# Altium PCB NODEMCU_ESP12.PcbDoc
Units mil, origin at the board's own origin, x right, y up, seen from the top; angles counter-clockwise.
Board outline 1208.03 x 1850.28 mil, 2 copper layers (Top Layer, Bottom Layer); 38 components, 35 nets, 148 pads, 266 vias.
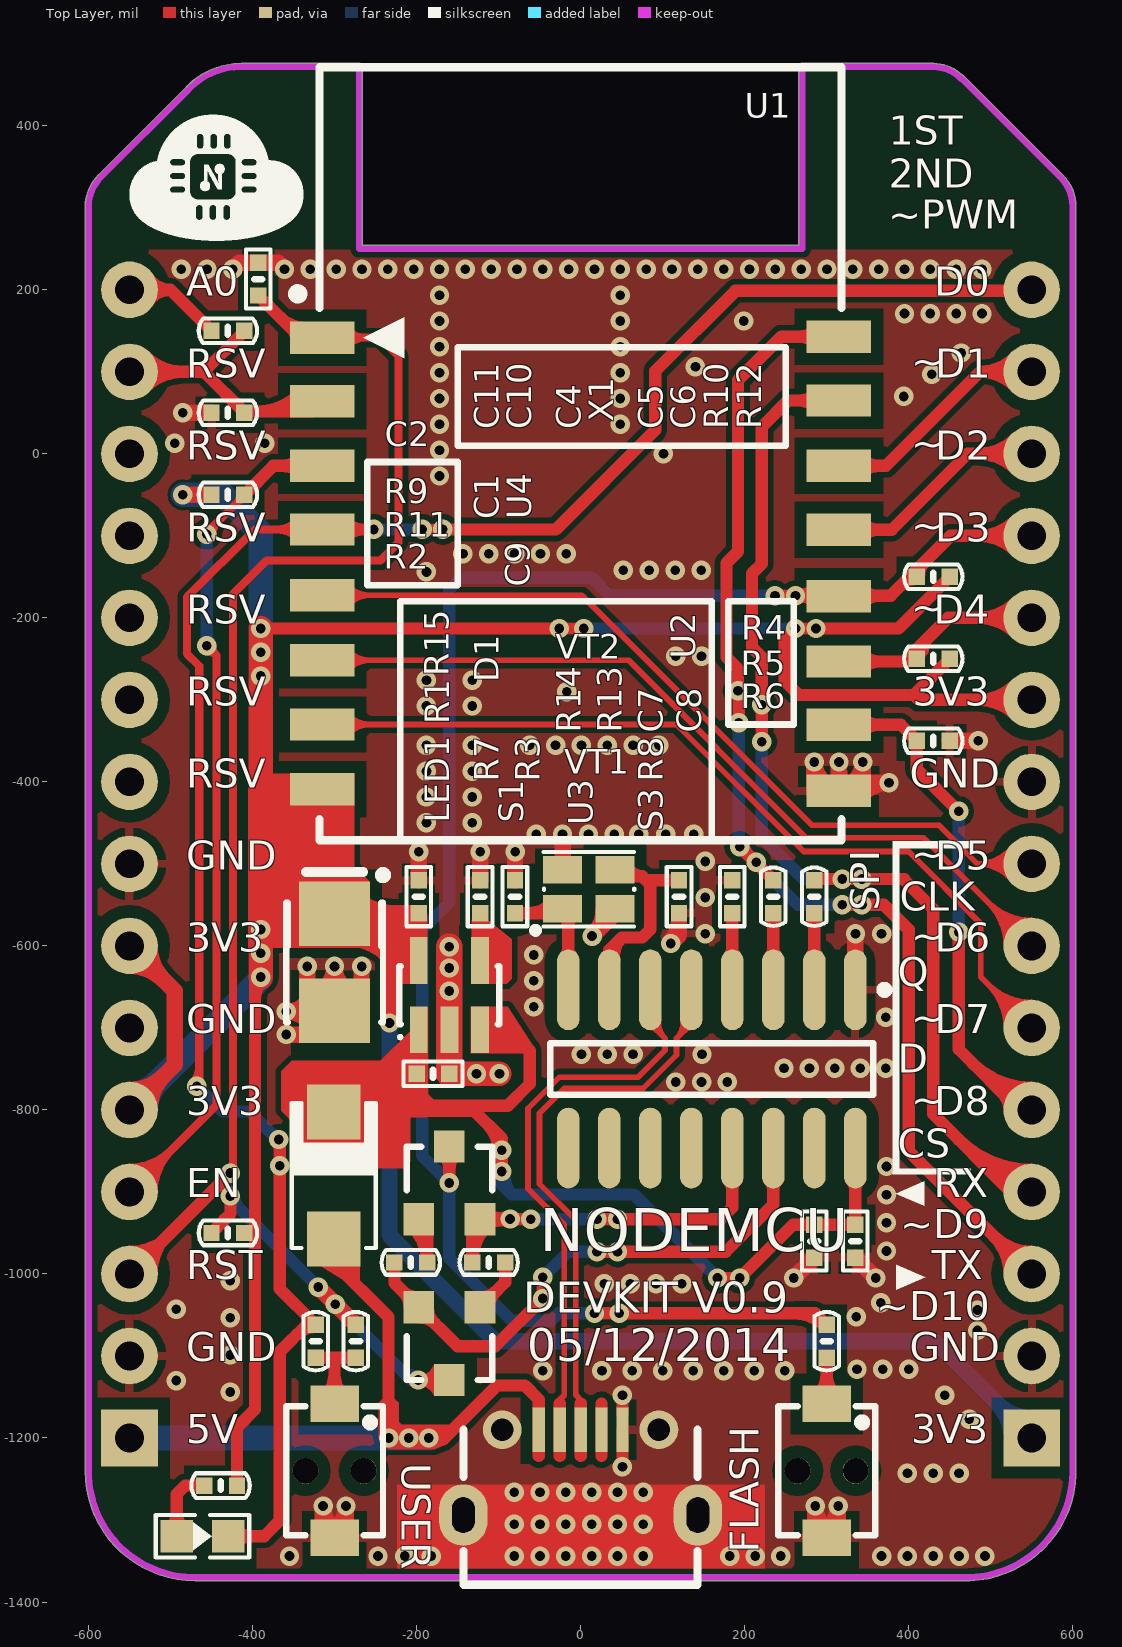
[diagram p0: Top Layer view]
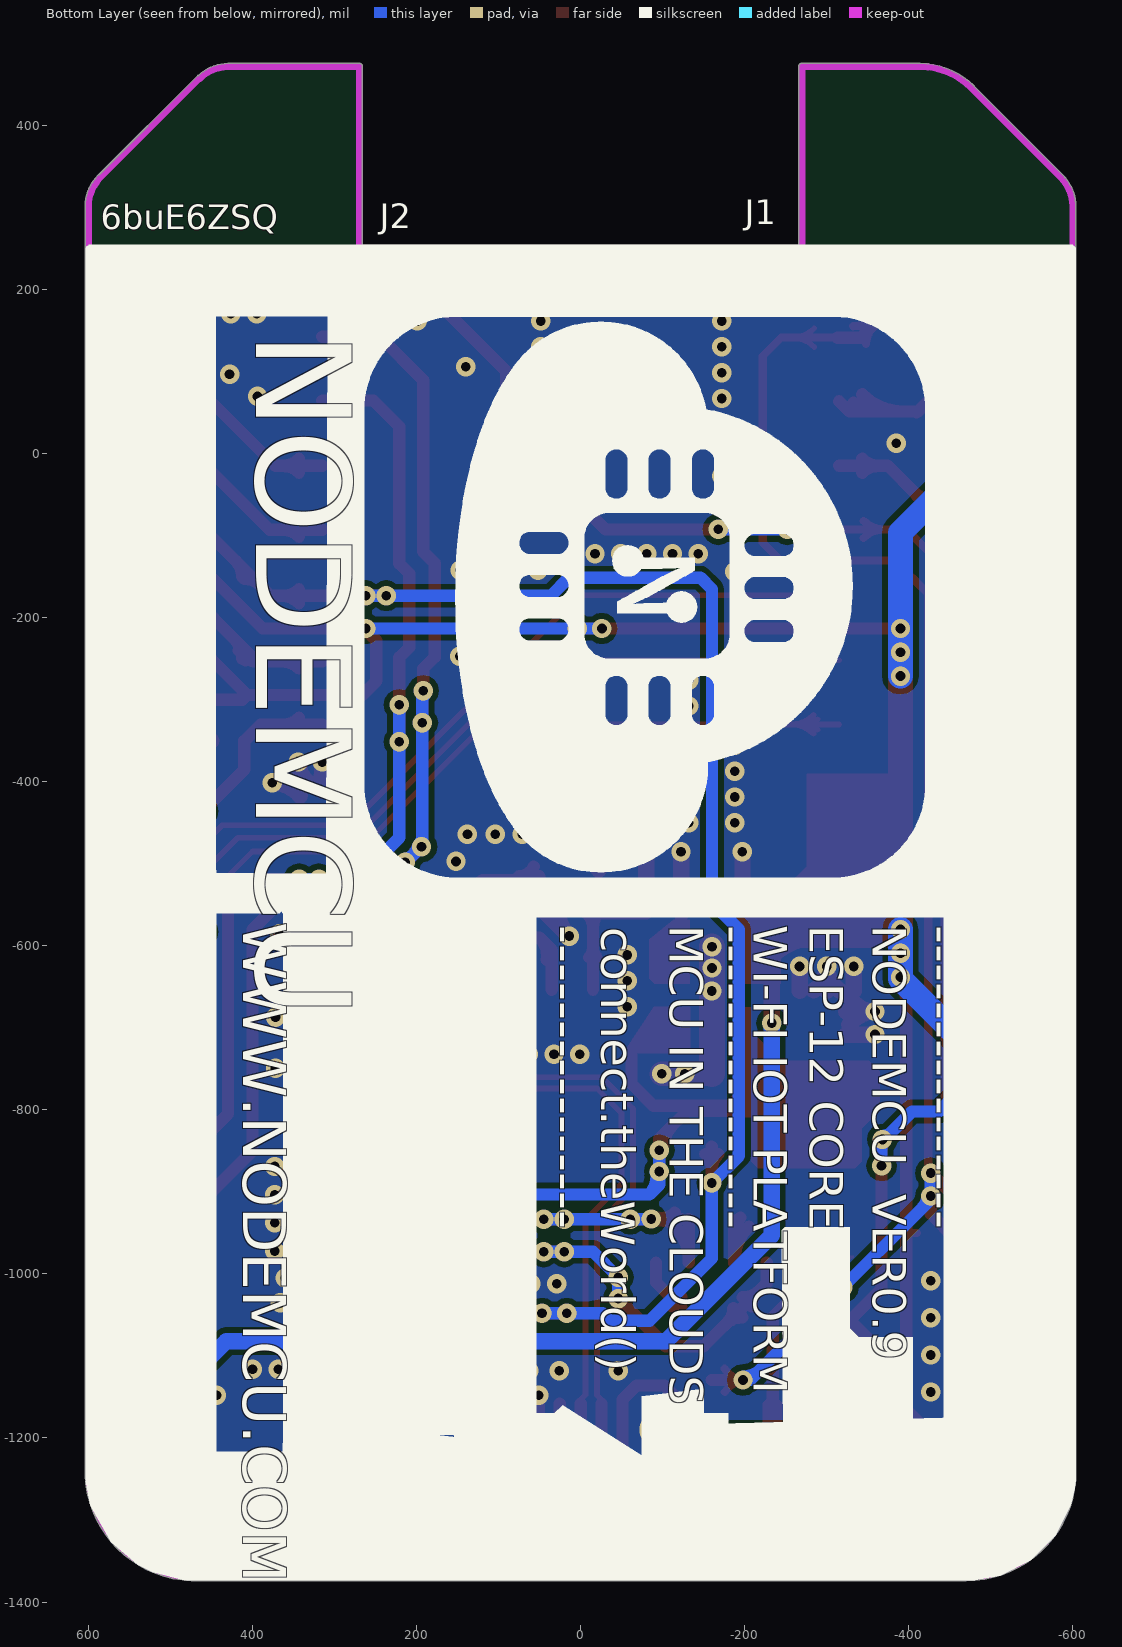
[diagram p1: Bottom Layer view, seen from below]

## Layer stack, top to bottom
Top Solder: solder mask 0.4, Solder Resist, Dk 3.5
Top Layer: signal copper 1.4
Dielectric 1: dielectric 12.6, FR-4, Dk 4.8
Bottom Layer: signal copper 1.4
Bottom Solder: solder mask 0.4, Solder Resist, Dk 3.5

## Board outline
-604.01,300 cw(c-600,300) -603.87,301.08 cw(c-599.89,301.64) -603.91,301.64 cw(c-549.89,301.64) -588.09,339.84 cw(c-585.25,337) -587.96,339.96 cw(c-585,337.25) -587.84,340.09 -481.09,446.84 cw(c-478.25,444) -480.35,447.42 cw(c-476.64,445.89) -479.48,448.73 cw(c-413,382.25) -413.95,476.26 cw(c-413.75,472.25) -413.75,476.26 -270,476.26 cw(c-270,472.25) -265.98,472.25 -265.98,254.02 265.99,254.02 265.99,472.25 cw(c270,472.25) 270,476.26 428.75,476.26 cw(c428.75,472.25) 430.18,476 cw(c429,422) 465.5,461.81 cw(c464.25,458) 467.09,460.84 587.59,340.33 cw(c585.36,337) 588.19,339.84 cw(c550,301.64) 604.01,302.13 cw(c550,301.64) 604.02,301.64 604.02,302 ccw(c600,302) 604.01,302.13 604.02,302 604.02,-1244 cw(c600,-1244) 603.94,-1244.76 cw(c470.37,-1240.37) 474.76,-1373.94 cw(c474,-1370) 474,-1374.01 -470.37,-1374.01 cw(c-470.37,-1240.37) -604.01,-1240.37

## Design rules (kind name [scope] priority, off if disabled: settings)
Clearance Clearance_Polygon [InNamedPolygon('Bottom Layer-GND') Or InNamedPolygon('Top Layer-GND') vs IsPad] p1: gap=15
Clearance [All] p2: gap=7
DiffPairsRouting [All] p1: maxlimit=10 minlimit=7 mostfreqgap=7 toplayer_minwidth=7 toplayer_maxwidth=100 toplayer_prefwidth=7 bottomlayer_minwidth=7 bottomlayer_maxwidth=100 bottomlayer_prefwidth=7 maxuncoupledlength=500
PolygonConnect PolygonConnect_USB [InComponent('U3')And IsPadHoleValid] p1: connectstyle=Direct reliefconductorwidth=10 reliefentries=4 polygonreliefangle="90 Angle" airgapwidth=10
PolygonConnect PolygonConnect_Via [IsVia] p2: connectstyle=Direct reliefconductorwidth=10 reliefentries=4 polygonreliefangle="90 Angle" airgapwidth=10
PolygonConnect [All] p3: connectstyle=Relief reliefconductorwidth=10 reliefentries=4 polygonreliefangle="90 Angle" airgapwidth=10
RoutingVias [All] p1: holewidth=28 width=50 viastyle="Through Hole" minholewidth=28 minwidth=50 maxholewidth=28 maxwidth=50
SolderMaskExpansion [All] p1: expansion=4
Width [All] p1: maxlimit=300 minlimit=7 preferedwidth=10
28 further rules are at their usual default settings.

## Classes and differential pairs
differential pair D: +D_P -D_N

## Components (designator, comment, footprint, x,y, rotation, side; value= is the part's Value field where it differs from the comment)
C1 "100uF TAJB107M006RNJ" SMT_C_Tantalum_B -300,-620 r270 top
C2 "470pF" SMT_C_0402 -393,213 r90 top
C4 "22pF" SMT_C_0402 -80,-540 r90 top
C5 "22pF" SMT_C_0402 120,-540 r270 top
C6 "100nF" SMT_C_0402 185,-540 r90 top
C7 "10uF" SMT_C_0402 285,-960 r270 top
C8 "100nF" SMT_C_0402 335,-960 r270 top
C9 "1uF" SMT_C_0402 -180,-756 r0 top
C10 "470pF" SMT_C_0402 -122.6,-540 r90 top
C11 "10uF" SMT_C_0402 -197.4,-540 r90 top
D1 "1N4007/M7(DO-214AC)" SMT_DIODE_DO_214AC -301,-880 r90 top
J1 "THT_Male_P_1x15" THT_Male_P_1x15-2.54mm -550,-1200 r0 bottom locked
J2 "THT_Male_P_1x15" THT_Male_P_1x15-2.54mm 550,-1200 r0 bottom locked
LED1 "BLUE" SMT_LED_0603 -461,-1319.77 r0 top
R1 "470" SMT_R_0402 -439,-1258 r0 top
R2 "12k" SMT_R_0402 -430,-50 r0 top
R3 "0(NC)" SMT_R_0402 -274,-1082 r90 top
R4 "12k" SMT_R_0402 430,-150 r180 top
R5 "12k" SMT_R_0402 430,-250 r180 top
R6 "12k" SMT_R_0402 430,-350 r180 top
R7 "470" SMT_R_0402 -323,-1082 r90 top
R8 "470" SMT_R_0402 300,-1082 r90 top
R9 "220k(1%)" SMT_R_0402 -430,150 r180 top
R10 "470" SMT_R_0402 235,-540 r270 top
R11 "100k(1%)" SMT_R_0402 -430,50 r0 top
R12 "470" SMT_R_0402 285,-540 r270 top
R13 "12k" SMT_R_0402 -112,-986 r180 top
R14 "12k" SMT_R_0402 -207,-986 r180 top
R15 "12k" SMT_R_0402 -430,-950 r180 top
S1 "KEY_USER" SMT_SW_PTS_820 -300,-1240 r270 top
S3 "KEY_FLASH" SMT_SW_PTS_820 300,-1240 r270 top
U1 "ESP_12" ESP_12 -314.96,141.67 r0 top locked
U2 "CH340G" SOP-16 160,-750 r270 top
U3 "USB_Micro_5S_B" USB_MICRO_5S_B 0,-1190 r180 top
U4 "SPX3819M5-L-3-3" SOT23-5 -160,-660 r0 top
VT1 "S8050" SMT_TRIODE_NPN -160,-1085 r180 top
VT2 "S8050" SMT_TRIODE_NPN -160,-889 r0 top
X1 "12MHz(2520/3225)" SMT_XTAL_2520 10,-531 r0 top

## Footprints (in the part's own frame and the unit in brackets; to place one, negate y for a bottom-side part, rotate by r counter-clockwise, add the part's x,y. Pads: shape width x height; smd on the part's side, far side on the other; paste and mask are expansions set on the pad)
ESP_12 [mm] "ESP-12 Wi-Fi Module by AI-Thinker"
  rect 2x1 smd: 1(0,0) 2(0,-1.97) 3(0,-3.97) 4(0,-5.94) 5(0,-7.98) 6(0,-9.99) 7(0,-11.98) 8(0,-13.99) 9(16,-14.03) 10(16,-11.99) 11(16,-10.03) 12(16,-8.01) 13(16,-5.95) 14(16,-3.97) 15(16,-1.95) 16(16,0.03)
  silkscreen extent -0.91,-15.57 16.08,8.37, body extent 0,-15.49 16,8.51, height 2.75
SMT_C_0402 [mil] "Surface mount capacitor 0402"
  rect 20x20 smd: 1(-20,0) 2(20,0)
  silkscreen extent -36,-15 36,15, body extent -20,-10 20,10, height 20
SMT_C_Tantalum_B [mm] "Capacitor, SM Tantalum; Body 3.5 x 2.8 mm (LxW typ)"
  rect 2x2.2 smd: 1(-1.5,0) 2(1.5,0)
  silkscreen extent -2.82,-1.5 1.85,1.63, body extent -1.75,-1.4 1.75,1.4, height 1.9
SMT_DIODE_DO_214AC [mm] "DO-214AC(SMA) Package"
  rect 1.7x1.67 smd: 1(-1.965,0) 2(1.965,0)
  silkscreen extent -2.25,-1.3 2.25,1.3, body extent -2.6,-1.3 2.6,1.3, height 2.35
SMT_LED_0603 [mm] "SMT LED"
  rect 1x1 smd: 1(-0.8,0) 2(0.8,0)
  silkscreen extent -1.45,-0.66 1.45,0.66, body extent -0.81,-0.4 0.81,0.4, height 0.6
SMT_R_0402 [mil] "Surface mount resistor 0402"
  rect 20x20 smd: 1(-20,0) 2(20,0)
  silkscreen extent -36,-15 36,15, body extent -20,-10 20,10, height 20
SMT_SW_PTS_820 [mm] "SMT Tactile ?Switch PTS 820 Series"
  rect 1.143x1.5 smd: 1(-2.075,0) 2(2.075,0)
  round 0.8 hole 0.8 unplated: MH1(0,0.9) MH2(0,-0.9)
  silkscreen extent -2,-1.5 2,1.5, body extent -2.25,-1.55 2.25,1.55, height 2.05
SMT_TRIODE_NPN [mm] "Surface mount NPN transistor, package SOT-23"
  rect 0.95x1 smd: 1(-0.95,-1.125) 2(0.95,-1.125) 3(0,1.125)
  silkscreen extent -1.33,-0.22 1.32,1.13, body extent -1.45,-1.4 1.45,1.4, height 1.3
SMT_XTAL_2520 [mm] "Quartz Crystal, SM; Body 2.5 x 2.0 mm"
  rect 1.2x0.85 smd: 1(-0.813,-0.6) 2(0.813,-0.6) 3(0.813,0.6) 4(-0.813,0.6)
  silkscreen extent -1.75,-1.37 1.41,1.15, body extent -1.25,-1 1.25,1, height 0.79
SOP-16 [mm] "16-Pin Small Outline Integrated Circuit 1.27 mm Pitch, IPC Low Density"
  oval 2.5x0.7 smd: 1(-2.45,4.445) 2(-2.45,3.175) 3(-2.45,1.905) 4(-2.45,0.635) 5(-2.45,-0.635) 6(-2.45,-1.905) 7(-2.45,-3.175) 8(-2.45,-4.445) 9(2.45,-4.445) 10(2.45,-3.175) 11(2.45,-1.905) 12(2.45,-0.635) 13(2.45,0.635) 14(2.45,1.905) 15(2.45,3.175) 16(2.45,4.445)
  silkscreen extent -2.57,-5 0.8,5.47, body extent -2.95,-5 2.96,4.98, height 1.45
SOT23-5 [mm] "SOT-23/SC-74A; 5 Leads; Body 3 x 3 mm, inc. leads (LxW max)"
  rect 0.55x1.45 smd: 1(-0.95,-1.075) 2(0,-1.075) 3(0.95,-1.075) 4(0.95,1.075) 5(-0.95,1.075)
  silkscreen extent -1.57,-1.35 1.55,0.9, body extent -1.45,-1.4 1.45,1.4, height 1.45
THT_Male_P_1x15-2.54mm [mil] "THT Male pin header strip 1x15 2.54mm pitch"
  rect 69x69 hole 35: 1(0,0)
  round 69 hole 35: 2(0,-100) 3(0,-200) 4(0,-300) 5(0,-400) 6(0,-500) 7(0,-600) 8(0,-700) 9(0,-800) 10(0,-900) 11(0,-1000) 12(0,-1100) 13(0,-1200) 14(0,-1300) 15(0,-1400)
  silkscreen extent -50,-1450 50,50, body extent -57,-1450 57,50, height 335
USB_MICRO_5S_B [mil] "USB Micro SMT 5S B"
  rect 15x54 smd: 1(51,0) 2(25.5,0) 3(0,0) 4(-25.5,0) 5(-51,0)
  oval 59.06x74.8 hole 27.56 slot 43.31 at 90 deg: 6(-143,104) 7(143,104)
  round 47.24 hole 27.5: 8(95.5,0) 9(-95.5,0)
  silkscreen extent -143,0 143,189, body extent -161,-9 161,204, height 105

## Part data
C1: library part SMT_C_Tantalum_B, "Capacitor, SM Tantalum; Body 3.5 x 2.8 mm (LxW typ)"
C2 C4 C5 C6 C7 C8 C9 C10 C11: library part SMT_C_0402, "Surface mount capacitor 0402"
D1: library part SMT_DIODE_SCHOTTKY_DO_214AC, "Surface mount schottky diode DO-214AC(SMA) Package"
J1 J2: "THT Male pin header strip 1x15"
LED1: library part SMT_LED_0603, "SMT LED"
R1 R2 R3 R4 R5 R6 R7 R8 R9 R10 R11 R12 R13 R14 R15: library part SMT_R_0402, "Surface mount resistor 0402"
S1 S3: library part SMT_SW_PTS_820, "SMT Tactile ?Switch PTS 820 Series"
U1: "ESP-12 Wi-Fi Module by AI-Thinker"
U2: "CH340G USB to serial (UART) bridge"
U3: "USB micro female SMT with 4 fixed foot"
U4: library part SPX3819, "500mA, Low-Noise LDO Voltage Regulator"
VT1 VT2: library part SMT_TRIODE_NPN, "Surface mount NPN transistor, package SOT-23"
X1: library part SMT_XTAL_PASSIVE, "Passive crystal"

## Via types
v1: diameter 23.62, hole 11.81, Top Layer to Bottom Layer, tented both sides, 266 vias

## Nets (pads, with @x,y where several pads share a name; then routed paths per layer and width w, separated by ;. In a path a pad name is that pad's centre, name@x,y a point inside that pad or via, vN(x,y) a via of type N, cw(c..) or ccw(c..) an arc to the next point about the centre after c; other vN are vias at no path point)
ADC: J1.14 R9.1 R11.2 U1.2 | length 518.6
  Top Layer w15: J1.14 -459.49,100 ; J1.14@-530.91,80.91 cw(c-484.82,34.82) -484.82,100 cw(c-484.82,165.18) J1.14@-530.91,119.09 ; R11.2@-410,50.51 -459.49,100 ; R11.2@-410,51.5 -327.57,51.5 U1.2 ; R9.1@-410,149.49 -459.49,100 ; -394.52,51.5 ccw(c-394.52,123.98) U1.2@-343.26,72.73 ; -358.3,51.5 ccw(c-358.3,87.77) U1.2@-332.66,62.12
ADC_EX: J1.15 R9.2 | length 185.7
  Top Layer w15: J1.15 -500,200 ; J1.15@-527.42,185.19 cw(c-500,167.21) -500,200 ; J1.15@-527.42,214.81 ccw(c-500,232.79) -500,200 ; R9.2 -500,200
D_N: U2.6 U3.2 | length 816.2
  Top Layer w7: U3.2@-28.33,-1167.67 ccw(c-35.16,-1160.84) -25.5,-1160.84 ccw(c-15.84,-1160.84) U3.2@-22.67,-1167.67 ; U3.2 -25.5,-1153.33 -20,-1147.83 ; -20,-1147.33 -20,-940 -64,-896 -64,-798.2 -25.8,-760 70.2,-760 103,-727.2 103,-713 ; U2.6@85,-699.26 cw(c85,-709.53) 92.27,-702.27 ; U2.6 85,-695 103,-713 ; U2.6@88.25,-689.38 ccw(c104.36,-691.4) 92.88,-702.88 ; U2.6@95.2,-690.25 ccw(c122.34,-693.66) 103,-713
  Top Layer w15: -25.5,-1222 U3.2 -25.5,-1158
D_P: U2.5 U3.3 | length 816.9
  Top Layer w7: U3.3@-2.83,-1167.67 ccw(c-9.66,-1160.84) 0,-1160.84 ccw(c9.66,-1160.84) U3.3@2.83,-1167.67 ; U3.3 0,-1153.33 -6,-1147.33 -6,-934.2 -50,-890.2 -50,-804 -20,-774 76,-774 117,-733 117,-713 ; U2.5@124.8,-690.25 cw(c97.66,-693.66) 117,-713 ; 127.12,-702.88 ccw(c115.64,-691.4) U2.5@131.75,-689.38 ; 127.73,-702.27 cw(c135,-709.53) U2.5@135,-699.26 ; U2.5 135,-695 117,-713
  Top Layer w15: 0,-1222 U3.3 0,-1158
EN: J1.4 R2.2 U1.3 | length 1328.8
  Top Layer w10: J1.4 -444,-794 -444,-246 v1(-456,-234) ; J1.4@-550,-880.5 ccw(c-550,-833.42) -516.71,-866.71 ccw(c-483.42,-900) J1.4@-530.5,-900 ; J1.4@-550,-870.5 ccw(c-550,-799.28) -499.64,-849.64 ccw(c-449.28,-900) J1.4@-520.5,-900 ; v1@-456,-240.81 cw(c-456,-257.25) -444.37,-245.63 cw(c-432.75,-234) v1@-449.19,-234 ; v1@-456,-96.51 R2.2@-410,-50.51 ; v1@-456,-91.19 ccw(c-456,-78.35) -446.92,-87.43 ; v1@-449.19,-98 cw(c-429.14,-98) -443.32,-83.82 ; R2.2@-418.89,-59.4 ccw(c-428.29,-50) R2.2@-415,-50 ; R2.2@-417.67,-58.18 cw(c-410,-65.85) R2.2@-410,-55
  Top Layer w15: R2.2@-410,-50.51 R2.2 -374.63,-14.63 U1.3 ; U1.3@-343.26,-23.24 ccw(c-364.06,-44.04) -364.06,-14.63 ccw(c-364.06,14.79) U1.3@-343.26,-6.01
  Bottom Layer w15: v1(-456,-234) v1(-456,-98)
GND: C1.2 C2.2 C4.2 C5.2 C6.2 C7.2 C8.2 C9.2 C10.2 C11.2 J1.2 J1.6 J1.8 J2.2 J2.9 R6.1 R11.1 S1.2 S3.2 U1.9 U2.1 U3.5 U3.6 U3.7 U3.8 U3.9 U4.2 X1.2 X1.4 | length 1697
  Top Layer w15: v1(51,-1235) U3.5 ; U3.5@51,-1172 v1(51,-1148)
  Top Layer w20: v1(-485,50) R11.1 ; v1(-424,225) -416,233 C2.2 -369,233 v1(-361,225) ; v1@-359,-708.16 C1.2@-324.04,-708.16 ; C1.2@-333.16,-654.96 v1(-333.16,-625) ; C1.2@-328.82,-663.46 cw(c-359,-644.55) v1@-359,-680.16 ; C1.2@-327.8,-696.17 ccw(c-359,-718.55) v1@-359,-680.16 ; C1.2@-324.04,-680.16 v1@-359,-680.16 ; C1.2@-316.09,-654.49 ccw(c-335.4,-625) -300.16,-625 ccw(c-265.29,-625) C1.2@-284.13,-654.34 ; S1.2@-314.16,-1317.96 -314.16,-1283 ccw(c-278.71,-1283) S1.2@-299.65,-1311.61 ; S1.2@-300.49,-1311.7 ccw(c-322.07,-1283) v1@-286.16,-1283 ; C1.2@-300.16,-654.96 v1@-300.16,-625 ; S1.2@-286.16,-1317.96 v1@-286.16,-1283 ; C1.2@-267.16,-654.96 v1@-267.16,-625 ; C11.2 v1@-197.4,-485.04 ; C10.2 v1@-122.6,-485.04 ; C4.2 v1@-80,-485.04 ; X1.4 v1(-22,-464) ; v1(14,-588) X1.2@43.99,-558.01 ; v1@14.92,-587.08 ccw(c-17.53,-554.62) X1.2@28.37,-554.62 ; v1@108.72,-595.72 ccw(c81.49,-568.49) C5.2@120,-568.49 ; v1(110,-597) 120,-587 C5.2 ; v1(260,-1005) C7.2 ; U1.9@285,-413 v1(285,-375.73) ccw(c315.91,-375.73) U1.9@300.2,-402.35 ; S3.2@285.84,-1317.96 285.84,-1283 ccw(c321.29,-1283) S3.2@300.35,-1311.61 ; S3.2@299.51,-1311.7 ccw(c277.93,-1283) v1@313.84,-1283 ; U1.9@308.11,-403.84 ccw(c291.58,-387.31) 314.96,-387.31 ccw(c338.34,-387.31) U1.9@321.81,-403.84 ; S3.2@313.84,-1317.96 v1@313.84,-1283 ; U1.9 v1@314.96,-375.73 ; 315.18,-388.11 cw(c329.78,-384.2) v1@316.69,-376.63 ; U1.9@329.39,-402.55 ccw(c312.07,-375.73) 344,-375.73 U1.9@344,-411 ; C8.2 v1(360,-1005) ; U2.1@335,-620 v1@335,-585.04 ; U1.9@341,-401 375.96,-401 ccw(c375.96,-445.05) U1.9@342.09,-416.88 ; R6.1 v1(485,-350)
  Top Layer w30: C9.2 v1(-99,-756)
  Top Layer w32: C9.2@-160.16,-756 v1(-160.16,-601)
  other v1: -355,-1344 -247,-1344 -214.5,-1344 -182,-1344 -81,-1344 -49.5,-1344 -18,-1344 13.5,-1344 45,-1344 76.5,-1344 182,-1344 213,-1344 244,-1344 367,-1344 398.5,-1344 430,-1344 461.5,-1344 493,-1344 -81,-1305 -49.5,-1305 -18,-1305 13.5,-1305 45,-1305 76.5,-1305 -314,-1283 -286,-1283 286,-1283 314,-1283 -81,-1266 -49.5,-1266 -18,-1266 13.5,-1266 45,-1266 76.5,-1266 398.5,-1243 430,-1243 461.5,-1243 474,-1177 444,-1148 -427,-1144 -493,-1130 -46,-1118 26,-1118 63.17,-1118 100.33,-1118 137.5,-1118 174.67,-1118 211.83,-1118 249,-1118 337,-1116 368.5,-1116 400,-1116 -427,-1098.75 484,-1069 -427,-1053.5 336,-1052 484,-1044 -493,-1043 366,-1035 29,-1012 60.5,-1012 92,-1012 123.5,-1012 -427,-1008.25 373,-972 373,-937.67 373,-903.33 373,-869 116,-766 147.5,-766 179,-766 -127,-756 248,-749 279,-749 310,-749 341,-749 372,-749 1,-732 32.5,-732 64,-732 148,-732 -359,-708 372,-687 -359,-680 -57,-674 -160,-655 -57,-642.5 -160.16,-627 -300,-625 -267,-625 -57,-611 152,-585 335.16,-585.04 367,-585 152,-541 152,-497 -197.24,-485.04 -122.44,-485.04 -79.84,-485.04 -54,-464 9.67,-464 41.17,-464 71,-464 104,-464 138,-464 -188,-450 -132,-450 -188,-418.5 -132,-418.5 375.96,-401.16 -188,-387 -132,-387 315.12,-375.73 344.16,-375.73 -188,-355.5 -132,-355.5 -62,-355.5 -30.5,-355.5 1,-355.5 32.5,-355.5 64,-355.5 95.5,-355.5 -188,-307.5 -132,-307.5 -17,-290 -188,-276 -132,-276 116,-247 147.5,-247 -188,-144 52,-142 83.67,-142 115.33,-142 147,-142 -143.5,-122 -112,-122 -80.5,-122 -49,-122 -17.5,-122 -172,-27 101,0 -172,4.5 -495,13 -385,13 -172,36 48.5,36 -172,67.5 48.5,67.5 394,70 428,97 -172,99 48.5,99 140,106 464,123 -172,130.5 48.5,130.5 -172,162 48.5,162 199,162 395,171 426.5,171 458,171 489.5,171 -172,193.5 48.5,193.5 -487,225 -455.5,225 -329.5,225 -298,225 -266.5,225 -235,225 -203.5,225 -172,225 -140.5,225 -109,225 -77.5,225 -46,225 -14.5,225 17,225 48.5,225 80,225 111.5,225 143,225 174.5,225 206,225 237.5,225 269,225 300.5,225 332,225 363.5,225 395,225 426.5,225 458,225 489.5,225
GPIO0: J2.12 R4.2 R8.2 U1.12 VT2.3 | length 2534
  Top Layer w15: VT2.3@-167.92,-853.61 cw(c-187.04,-872.73) -160,-872.73 cw(c-132.96,-872.73) VT2.3@-152.08,-853.61 ; v1(-160,-889) VT2.3 ; v1(17,-1048) 286,-1048 R8.2 ; v1(237,-173) 378,-173 451,-100 J2.12 ; 260.17,-1048 cw(c260.17,-1101.83) R8.2@298.23,-1063.77 ; v1@264.16,-169.27 ccw(c271.79,-156.04) U1.12@275.74,-170.79 ; v1@264.21,-173 cw(c264.21,-204.74) U1.12@286.66,-182.3 ; v1@267.5,-173 ccw(c267.5,-145.91) U1.12@286.66,-165.06 ; U1.12@343.26,-182.3 cw(c365.71,-204.74) 365.71,-173 ; U1.12@343.26,-165.06 ccw(c362.42,-145.91) 362.42,-173 ; 390.37,-160.63 cw(c410,-180.26) R4.2@410,-152.5 ; R4.2@412.5,-150 cw(c440.26,-150) 420.63,-130.37 ; J2.12@530.91,-119.09 ccw(c484.82,-165.18) 484.82,-100 ccw(c484.82,-34.82) J2.12@530.91,-80.91
  Bottom Layer w15: v1(47,-1048) -26.79,-1048 -35.79,-1057 -84,-1057 -160,-981 v1(-160,-889) -193,-856 -193,-580 -160.16,-547.16 -160.16,-165.16 -146,-151 14,-151 36,-173 v1(262,-173)
GPIO2: J2.11 R5.2 U1.11 | length 485.6
  Top Layer w15: U1.11 394.79,-253.21 ; U1.11@343.26,-261.82 cw(c364.06,-282.63) 364.06,-253.21 cw(c364.06,-223.79) U1.11@343.26,-244.59 ; R5.2@407.37,-240.63 cw(c412.79,-246.06) 417.22,-239.8 ; R5.2@408.56,-252.04 ccw(c402.37,-260.78) 394.79,-253.21 ; R5.2@412.5,-250 cw(c447.51,-250) 422.75,-225.25 ; J2.11@530.91,-219.09 ccw(c484.82,-265.18) 484.82,-200 ccw(c484.82,-134.82) J2.11@530.91,-180.91 ; J2.11 448,-200 394.79,-253.21 ; 396.22,-253.21 ccw(c396.22,-236.22) 408.23,-248.23 cw(c396.22,-236.22) 396.22,-253.21
GPIO4: J2.13 U1.13 | length 422
  Top Layer w15: U1.13 379.42,-92.58 472,0 J2.13 ; U1.13@343.26,-101.19 cw(c364.06,-122) 364.06,-92.58 cw(c364.06,-63.16) U1.13@343.26,-83.96 ; J2.13@530.91,-19.09 ccw(c484.82,-65.18) 484.82,0 ccw(c484.82,65.18) J2.13@530.91,19.09
GPIO5: J2.14 U1.14 | length 425.9
  Top Layer w15: U1.14 372.37,-14.63 487,100 ; U1.14@343.26,-23.24 cw(c364.06,-44.04) 364.06,-14.63 cw(c364.06,14.79) U1.14@343.26,-6.01 ; J2.14@530.45,81.38 ccw(c487,40.01) 487,100 ; J2.14@530.45,118.62 cw(c487,159.99) 487,100 ; J2.14 487,100
GPIO12: J2.7 U1.6 | length 1378.5
  Top Layer w7: U1.6 58.63,-251.63 275,-468 418,-468 J2.7 ; U1.6@-288.78,-258.13 cw(c-273.1,-273.81) -273.1,-251.63 cw(c-273.1,-229.46) U1.6@-288.78,-245.14 ; U1.6@-283.83,-263.08 cw(c-256.2,-290.71) -256.2,-251.63 cw(c-256.2,-212.56) U1.6@-283.83,-240.19 ; J2.7@519,-600 ccw(c444.16,-600) 497.08,-547.08 ccw(c550,-494.16) J2.7@550,-569 ; J2.7@526,-600 ccw(c468.06,-600) 509.03,-559.03 ccw(c550,-518.06) J2.7@550,-576 ; J2.7@533,-600 ccw(c491.96,-600) 520.98,-570.98 ccw(c550,-541.96) J2.7@550,-583
GPIO13: J2.6 U1.7 | length 1425.6
  Top Layer w7: U1.7 116.98,-329.98 272,-485 400,-485 488,-573 488,-638 J2.6 ; U1.7@-288.78,-336.48 cw(c-273.1,-352.15) -273.1,-329.98 cw(c-273.1,-307.81) U1.7@-288.78,-323.49 ; U1.7@-283.83,-341.42 cw(c-256.2,-369.05) -256.2,-329.98 cw(c-256.2,-290.91) U1.7@-283.83,-318.54 ; J2.6@519,-700 ccw(c444.16,-700) 497.08,-647.08 ccw(c550,-594.16) J2.6@550,-669 ; J2.6@526,-700 ccw(c468.06,-700) 509.03,-659.03 ccw(c550,-618.06) J2.6@550,-676 ; J2.6@533,-700 ccw(c491.96,-700) 520.98,-670.98 ccw(c550,-641.96) J2.6@550,-683
GPIO14: J2.8 U1.5 | length 1320.2
  Top Layer w7: U1.5 1.5,-172.5 282,-453 437,-453 484,-500 ; U1.5@-288.78,-178.99 cw(c-273.1,-194.67) -273.1,-172.5 cw(c-273.1,-150.33) U1.5@-288.78,-166.01 ; U1.5@-283.83,-183.94 cw(c-256.2,-211.57) -256.2,-172.5 cw(c-256.2,-133.43) U1.5@-283.83,-161.06 ; J2.8@526.14,-519.79 ccw(c484,-554.75) 484,-500 ; J2.8@526.14,-480.21 cw(c484,-445.25) 484,-500 ; J2.8@531.53,-515.32 ccw(c498.91,-542.39) 498.91,-500 ccw(c498.91,-457.61) J2.8@531.53,-484.68 ; J2.8@536.92,-510.85 ccw(c513.81,-530.02) 513.81,-500 ccw(c513.81,-469.98) J2.8@536.92,-489.15 ; J2.8 484,-500
GPIO15: J2.5 R6.2 U1.10 | length 819.7
  Top Layer w15: U1.10 390.37,-330.37 R6.2 410,-385 v1(461,-436) ; U1.10@343.26,-338.99 cw(c364.06,-359.79) 364.06,-330.37 cw(c364.06,-300.96) U1.10@343.26,-321.76 ; v1(461,-583) 461,-726 535,-800 J2.5 ; 478.3,-743.3 ccw(c550,-671.6) J2.5@550,-773 ; 503.91,-768.91 ccw(c550,-722.82) J2.5@550,-788 ; 514.51,-779.51 cw(c494.03,-800) J2.5@523,-800
  Bottom Layer w15: v1(461,-583) v1(461,-436)
GPIO16: J2.15 LED1.2 R7.2 U1.4 | length 2809.2
  Top Layer w10: v1@-472.82,-766.18 ccw(c-491.69,-747.31) -465,-747.31 ; v1(-468,-771) -465,-768 -465,-258.67 -479.81,-243.86 -479.81,-174.81 -397.18,-92.18 U1.4 ; U1.4@-345.03,-102.57 ccw(c-370.1,-127.64) -370.1,-92.18 ccw(c-370.1,-56.73) U1.4@-345.03,-81.8
  Top Layer w15: LED1.2 -385.77,-1319.77 -367,-1301 -367,-1095 -334,-1062 R7.2 -367,-1018 v1@-367,-836 ; LED1.2@-420.89,-1328.38 cw(c-400.09,-1349.18) -400.09,-1319.77 cw(c-400.09,-1290.35) LED1.2@-420.89,-1311.15 ; v1@-371.05,-839.05 cw(c-380.82,-848.82) -367,-848.82 ; -346.05,-1074.05 cw(c-323,-1097.09) R7.2@-323,-1064.5 ; U1.4 v1(-252.18,-92.18) ; U1.4@-286.66,-100.8 cw(c-265.86,-121.6) -265.86,-92.18 cw(c-265.86,-62.77) U1.4@-286.66,-83.57 ; v1@-193,-92.18 -30.18,-92.18 91,29 91,101 188.69,198.69 548.69,198.69 J2.15
  Bottom Layer w15: v1(-468,-771) -437,-802 -404,-802 v1@-368,-838 ; -378.77,-827.23 ccw(c-368,-816.45) v1@-368,-831.69 ; v1(-367,-868) v1@-367,-838 ; v1(-252.18,-92.18) v1@-168,-92.18
  other v1: -368,-836 -193,-92 -168,-92
NetC6_1: C6.1 U2.4 | length 117.4
  Top Layer w15: U2.4@180.56,-613.67 ccw(c169.84,-602.95) 185,-602.95 ccw(c200.16,-602.95) U2.4@189.44,-613.67 ; U2.4 C6.1
NetC10_1: C10.1 U4.4 | length 57.7
  Top Layer w15: U4.4 C10.1
NetLED1_1: LED1.1 R1.1 | length 135.3
  Top Layer w15: LED1.1@-501.11,-1311.15 ccw(c-521.91,-1290.35) -492.5,-1290.35 ccw(c-463.08,-1290.35) LED1.1@-483.88,-1311.15 ; LED1.1 -492.5,-1268.5 -482,-1258 R1.1
NetR3_1: R3.1 R7.1 S1.1 | length 160.7
  Top Layer w15: R7.1 R3.1 ; S1.1@-310.61,-1147.7 ccw(c-336.21,-1122.09) -300,-1122.09 ccw(c-263.79,-1122.09) S1.1@-289.39,-1147.7 ; S1.1 -300,-1103.5
NetR8_1: R8.1 S3.1 | length 113.2
  Top Layer w15: S3.1@289.39,-1147.7 ccw(c263.79,-1122.09) 300,-1122.09 ccw(c336.21,-1122.09) S3.1@310.61,-1147.7 ; S3.1 R8.1
NetR10_2: R10.2 U2.3 | length 117.4
  Top Layer w15: U2.3@230.56,-613.67 ccw(c219.84,-602.95) 235,-602.95 ccw(c250.16,-602.95) U2.3@239.44,-613.67 ; U2.3 R10.2
NetR12_2: R12.2 U2.2 | length 117.4
  Top Layer w15: U2.2@280.56,-613.67 ccw(c269.84,-602.95) 285,-602.95 ccw(c300.16,-602.95) U2.2@289.44,-613.67 ; U2.2 R12.2
NetR13_1: R13.1 VT1.1 | length 109.9
  Top Layer w15: VT1.1 -92,-1010.11 R13.1 ; VT1.1@-122.6,-1028.52 ccw(c-122.6,-999.11) -101.8,-1019.91 ; VT1.1@-111.4,-1039.72 cw(c-86.73,-1039.72) VT1.1@-104.17,-1022.28
NetR13_2: R13.2 U2.13 VT2.2 | length 631.7
  Top Layer w15: R13.2 VT2.2@-132,-933 ; R13.2@-132,-984.01 cw(c-72.86,-984.01) VT2.2@-114.68,-942.2 ; VT2.2 v1(-60.71,-933.29) ; VT2.2@-114.68,-941.21 cw(c-95.56,-960.33) -95.56,-933.29 cw(c-95.56,-906.25) VT2.2@-114.68,-925.37 ; -103.19,-931.25 ccw(c-98.06,-912.11) v1@-88.16,-929.27 ; -101.73,-934.95 cw(c-97.1,-952.23) v1@-88.16,-936.73 ; v1(20,-933.29) 170.71,-933.29 185,-919 U2.13 ; U2.13@180.56,-886.33 cw(c169.84,-897.05) 185,-897.05 cw(c200.16,-897.05) U2.13@189.44,-886.33
  Bottom Layer w15: v1@-86,-933.29 v1(45,-933.29)
  other v1: -86,-933
NetR14_1: R14.1 VT2.1 | length 120.8
  Top Layer w15: VT2.1@-205.32,-942.2 cw(c-249.55,-986.43) R14.1@-187,-986.43 ; VT2.1@-194.72,-931.59 cw(c-213.34,-950.22) VT2.1@-187,-950.22 ; R14.1 VT2.1@-187,-935
NetR14_2: R14.2 U2.14 VT1.2 | length 834.2
  Top Layer w15: R14.2 -227,-1011.11 VT1.2 -150.11,-1088 -104,-1088 v1(-46,-1030) v1(-46,-1004) ; -218.2,-1019.91 ccw(c-197.4,-999.11) VT1.2@-197.4,-1028.52 ; VT1.2@-215.83,-1022.28 cw(c-233.27,-1039.72) VT1.2@-208.6,-1039.72 ; VT1.2@-197.4,-1052.89 cw(c-197.4,-1082.31) -176.6,-1061.51 ; VT1.2@-186.2,-1041.69 ccw(c-161.54,-1041.69) VT1.2@-178.98,-1059.13 ; v1(20,-973) 177,-973 235,-915 U2.14 ; U2.14@230.56,-886.33 cw(c219.84,-897.05) 235,-897.05 cw(c250.16,-897.05) U2.14@239.44,-886.33
  Bottom Layer w15: v1(-46,-1030) v1(-46,-1004) -15,-973 v1(20,-973) v1(45,-973)
NRST: C2.1 J1.3 R3.2 R15.2 U1.1 VT1.3 | length 2384.3
  Top Layer w7: U1.1@-284.87,130.23 cw(c-257.24,102.6) -257.24,141.67 cw(c-257.24,180.75) U1.1@-284.87,153.12
  Top Layer w10: J1.3@-550,-970.5 ccw(c-550,-899.28) -499.64,-949.64 ccw(c-449.28,-1000) J1.3@-520.5,-1000 ; v1(-427,-877) -424,-874 -424,-171 -383,-130 -244,-130 -222,-108 -222,119 -244.67,141.67 U1.1@-312.96,141.67 ; -371,173 ccw(c-331,210) U1.1@-332.03,155.52 ; -358.06,154.93 cw(c-375,134) U1.1@-348.07,134 ; VT1.3@-175.65,-1143.92 ccw(c-204.85,-1164.15) v1(-198,-1129.29) ccw(c-200.15,-1101.15) VT1.3@-175.6,-1115.09
  Top Layer w15: J1.3 v1(-427,-877) ; R15.2 -434.5,-934.5 -434.5,-933.99 -427,-926.49 v1(-427,-905) ; C2.1 -341.67,141.67 U1.1 U1.1@-312.96,141.67 ; v1(-198,-1129.29) VT1.3
  Top Layer w20: v1(-320,-1016) R3.2
  Bottom Layer w15: v1(-427,-877) v1(-427,-905) -427,-909 v1(-299,-1037) -206.71,-1129.29 v1(-198,-1129.29) ; v1@-422.69,-905 ccw(c-402.62,-905) -416.81,-919.19 ; -220.23,-1115.77 ccw(c-198,-1093.55) v1@-198,-1124.98
OTG_ID: U3.4 | length 64
  Top Layer w15: 25.5,-1222 U3.4 25.5,-1158
POWEN: C7.1 C8.1 C9.1 D1.2 U2.16 U4.1 U4.3 | length 1947.4
  Top Layer w15: D1.2@-304.6,-772.14 cw(c-260.29,-808) -260.29,-751 ; D1.2@-304.27,-779.5 ccw(c-252.36,-727.59) -252.36,-801 ; D1.2@-301,-792.64 -259.36,-751 C9.1@-197.4,-751 ; -293.66,-768.89 ccw(c-216.15,-691.38) -216.15,-801 ; D1.2@-292.94,-781.57 cw(c-228.85,-833.46) -228.85,-751 ; -283.06,-758.29 ccw(c-179.94,-655.17) -179.94,-801 ; D1.2@-281.28,-791.01 cw(c-197.41,-858.91) C9.1@-197.41,-751 ; -267,-801 -130,-801 -96,-835 v1(-96,-875) ; -218.11,-751 cw(c-218.11,-774.11) C9.1@-201.77,-757.77 ; C9.1@-201.77,-754.23 ccw(c-212.31,-743.69) -197.4,-743.69 ; C9.1 -200,-777 -182,-795 -89,-795 -62,-768 -62,-728 -87.68,-702.32 U4.3 ; U4.1 C9.1@-197.4,-751 ; -113.26,-817.74 cw(c-144.52,-849) v1@-100.31,-849 ; v1(167,-1005) v1(194,-1005) 259,-940 C7.1 C8.1 U2.16 ; U2.16@330.56,-886.33 cw(c319.84,-897.05) 335,-897.05 cw(c350.16,-897.05) U2.16@339.44,-886.33
  Bottom Layer w15: v1(-96,-849) -96,-890.84 -83.84,-903 ; v1@-91.79,-875.92 ccw(c-63.03,-882.19) -83.84,-903 ; v1(194,-1005) v1(167,-1005) 65,-903 -83.84,-903
RXD0: J2.4 R12.1 U1.15 | length 1631.4
  Top Layer w15: v1(221,-351) v1(221,-306) 221,-248 209,-236 209,-146 221,-134 221,33 252.9,64.9 U1.15 ; R12.1@285,-518.5 v1(319,-518.5) 395,-518.5 ; U1.15@286.66,56.29 ccw(c265.86,35.48) 265.86,64.9 ccw(c265.86,94.32) U1.15@286.66,73.52 ; 395,-520 430,-555 430,-805 525,-900 J2.4 ; 461.23,-836.23 ccw(c550,-747.46) J2.4@550,-873 ; 486.84,-861.84 ccw(c550,-798.67) J2.4@550,-888 ; 512.44,-887.44 ccw(c550,-849.89) J2.4@550,-903
  Bottom Layer w15: v1(221,-306) v1(221,-351) 221,-467.79 271.71,-518.5 v1(319,-518.5) v1(343,-518.5)
TXD0: J2.3 R10.1 U1.16 | length 1851
  Top Layer w15: v1@188.95,-292.05 cw(c179.18,-301.82) 193,-301.82 ; v1(192,-289) 192,-262 178,-248 178,-133 192,-119 192,90 244.85,142.85 U1.16 ; v1(193,-328) v1@193,-290 ; v1(194,-479) R10.1 ; v1@198.16,-477.88 ccw(c221.42,-471.65) v1@209.38,-492.5 ; v1@198.26,-478.36 ccw(c215.8,-475.73) v1@206.93,-491.09 ; 204.93,-489.93 ccw(c214,-480.87) v1@214,-493.69 ; v1@218.31,-498 ccw(c231.13,-498) 222.07,-507.07 ; U1.16@286.66,134.24 ccw(c265.86,113.44) 265.86,142.85 ccw(c265.86,172.27) U1.16@286.66,151.47 ; v1(319,-550) 370,-550 400,-580 400,-850 J2.3 ; J2.3@523,-1000 ccw(c457.82,-1000) 503.91,-953.91 ccw(c550,-907.82) J2.3@550,-973
  Bottom Layer w15: v1@188.95,-292.05 cw(c179.18,-301.82) 193,-301.82 ; 193,-466.18 ccw(c206.82,-466.18) v1@197.05,-475.95 ; v1@193,-289 v1(193,-328) 193,-478 265,-550 v1(319,-550) v1(343,-550) ; v1@198.16,-477.88 ccw(c221.41,-471.65) v1@209.38,-492.5 ; 204.93,-489.93 ccw(c214,-480.87) v1@214,-493.69 ; v1@218.31,-498 ccw(c231.13,-498) 222.07,-507.07
  other v1: 214,-498
VDD3V3: C1.1 C11.1 J1.5 J1.7 J2.1 J2.10 R1.2 R2.1 R4.1 R5.1 R15.1 U1.8 U4.5 | length 5717.2
  Top Layer w10: R15.1 -398,-950 -397,-949
  Top Layer w15: R1.2 -419,-1187 -397,-1165 -397,-949 -397,-645 v1(-390,-638) ; -397,-665.31 cw(c-362.69,-665.31) v1@-386.95,-641.05 ; v1(-390,-213) v1(-26,-213) v1(4,-213) ; 253.23,-223.77 ccw(c242.45,-213) v1@257.69,-213 ; R5.1 450,-250.51 406.51,-294 ; R4.1@450,-150.51 387.51,-213 264,-213 249,-228 249,-277 266,-294 406.51,-294 ; J2.10@530.91,-319.09 ccw(c484.82,-365.18) 484.82,-300 ccw(c484.82,-234.82) J2.10@530.91,-280.91 ; J2.10 412.51,-300 406.51,-294
  Top Layer w20: J1.5 -495,-745 -495,-655 J1.7 ; J1.5@-550,-775.5 ccw(c-550,-716.35) -508.18,-758.18 ccw(c-466.35,-800) J1.5@-525.5,-800 ; J1.7@-550,-624.5 cw(c-550,-683.65) -508.18,-641.82 cw(c-466.35,-600) J1.7@-525.5,-600 ; v1(-485,-50) R2.1 ; C1.1 -285.06,-560.94 -233,-613 ; C1.1@-299.06,-560 C11.1 U4.5@-197.4,-617.68 ; C1.1@-293.98,-590.24 cw(c-288.42,-668.41) -233,-613 ; C1.1@-275.3,-581.71 cw(c-222.88,-634.13) -222.88,-560 ; C1.1@-275.3,-540.18 ccw(c-227.44,-492.32) -227.44,-560 ; C1.1@-266.69,-560.94 ccw(c-222.36,-560.94) -253.71,-592.29 ; v1(-233,-694) -233,-613
  Top Layer w30: v1(-390,-638) v1(-390,-609) v1@-390,-584 ; v1(-390,-580) v1(-390,-213) ; -382.89,-409.11 U1.8
  Top Layer w50: C1.1@-314.96,-545.98 U1.8@-314.96,-418 ; -314.96,-499.64 ccw(c-242.63,-499.64) C1.1@-293.78,-550.78
  Bottom Layer w15: v1(-26,-213) v1(4,-213) v1(287,-213)
  Bottom Layer w20: v1(-233,-694) -233,-953 -104,-1082 432,-1082 J2.1 ; J2.1@525.5,-1200 ccw(c466.35,-1200) 508.18,-1158.18 ccw(c550,-1116.35) J2.1@550,-1175.5
  Bottom Layer w30: J1.5 -390,-640 v1(-390,-638) v1(-390,-609) v1(-390,-580) ; J1.5@-550,-780.5 ccw(c-550,-733.42) -516.71,-766.71 ccw(c-483.42,-800) J1.5@-530.5,-800 ; v1(-485,-50) -436,-50 -390,-96 v1(-390,-271)
  other v1: -390,-242 262,-213
VDDUSB: D1.1 J1.1 U3.1 | length 1002.2
  Top Layer w15: D1.1@-317.48,-950.25 cw(c-348.02,-986) D1.1@-301,-986 ; D1.1 D1.1@-301,-986 ; D1.1@-284.52,-950.25 ccw(c-253.98,-986) D1.1@-301,-986 ; -51,-1222 U3.1 -51,-1153 -68,-1136 -102,-1136 -166,-1200 v1(-234,-1200) -234.32,-1199.68 -234.32,-1052.68 D1.1@-301,-986
  Bottom Layer w30: J1.1 v1(-185,-1200)
  other v1: -209.5,-1200
XI: C5.1 U2.7 X1.3 | length 302.2
  Top Layer w15: U2.7 35,-605 50.17,-589.83 ; U2.7@41.21,-617.16 cw(c72.68,-612.35) 50.17,-589.83 ; X1.3@50,-515 75,-515 ; X1.3@57.29,-503.57 ccw(c75,-495.56) 75,-515 ; C5.1 80,-520 75,-515 ; 50.17,-589.83 75.17,-589.83 85,-580 85,-525 75,-515
XO: C4.1 U2.8 X1.1 | length 254.3
  Top Layer w15: C4.1 X1.1@-20,-560 ; -64.15,-560 ccw(c-64.15,-519.35) X1.1@-35.41,-548.09 ; X1.1@-21.63,-561.15 cw(c-37.62,-577.15) -15,-577.15 ; U2.8@-19.44,-613.67 ccw(c-30.16,-602.95) -15,-602.95 ccw(c0.16,-602.95) U2.8@-10.56,-613.67 ; U2.8 X1.1@-15,-550 ; -15,-576.67 cw(c6.95,-576.67) X1.1@-8.57,-561.15
pads on no net: J1.9 J1.10 J1.11 J1.12 J1.13 S1.MH1 S1.MH2 S3.MH1 S3.MH2 U2.9 U2.10 U2.11 U2.12 U2.15

## Polygon pours and split planes (outlines as drawn)
GND on Bottom Layer "Bottom Layer-GND" (solid, remove dead copper, pour order 4): -602,250 -602,-1370 591.04,-1370 598,-1362.54 598,250
GND on Top Layer "Top Layer-GND" (solid, remove dead copper, pour order 3): -602,249 -602,-1370 591.04,-1370 598,-1362.54 598,249

## Keep-outs
Keep-Out Layer:
  lines w8: -600,300 -600,-1240.37 ccw(c-470.37,-1240.37) -470.37,-1370 474,-1370 ; -599.89,301.64 cw(c-549.89,301.64) -585.25,337 ; -585,337.25 -478.25,444 ; -476.64,445.89 cw(c-413,382.25) -413,472.25 ; -413.75,472.25 -270,472.25 -270,250 270,250 270,472.25 428.75,472.25 ; 429,472 cw(c429,422) 464.36,457.36 ; 464.25,458 585,337.25 ; 470.37,-1370 ccw(c470.37,-1240.37) 600,-1240.37 ; 585.36,337 cw(c550,301.64) 600,301.64 ; 600,-1244 600,302

## Other copper
Top Layer:
  rectangle net GND: -224,-1359 225,-1257
  region net VDDUSB: -333,-978 -333,-980 -287,-1009 -269,-1009 -269,-978
  region net VDDUSB: -234,-1214 -178,-1214 -162,-1207 -154,-1184 -218,-1184 -222,-1180 -222,-1157 -227,-1152 -241,-1152 -246,-1157 -246,-1201 -242,-1209
  region net VDD3V3: -299.06,-560 -187,-560 -187,-646 -244,-646 -244,-615 -261,-598 -299,-587
  region net NetC10_1: -133,-568 -113,-568 -84,-592 -84,-640 -90,-646 -133,-646
  region net POWEN: -134,-674 -89,-674 -55,-726 -69,-731 -134,-731
  region net POWEN: -334,-742 -246,-742 -208,-704 -208,-675 -186,-675 -186,-791 -182,-795 -182,-803 -188,-809 -334,-809
  region net VDD3V3: -276,-390 -388,-390 -405,-407 -405,-602 -256,-602 -257,-601 -257,-522 -276,-503
  region net POWEN: -352,-740 -211,-740 -208,-743 -208,-863 -216,-871 -335,-871 -343,-863 -343,-823 -365,-801 -365,-753
Bottom Layer:
  rectangle net GND: -224,-1359 225,-1261

## Silkscreen, mask and mechanical layers (free items; w line width, h text height)
Top Overlay:
  drawing of 2555 lines, arcs and shapes, not listed
  text "1ST" at 376,365 h60
  text "2ND" at 375.56,313 h60
  text "~PWM" at 375,263 h60
  text "A0" at -481,181 h60
  text "D0" at 430.95,181 h60
  text "~" at 403,84 h60
  text "RSV" at -481,81.07 h60
  text "D1" at 432.24,81.07 h60
  text "~" at 403,-16 h60
  text "RSV" at -481,-18.86 h60
  text "D2" at 432.41,-18.86 h60
  text "~" at 403,-116 h60
  text "RSV" at -481,-118.79 h60
  text "D3" at 432.3,-118.79 h60
  text "~" at 403,-216 h60
  text "RSV" at -481,-218.71 h60
  text "D4" at 430.43,-218.71 h60
  text "RSV" at -481,-318.64 h60
  text "3V3" at 405.21,-318.64 h60
  text "RSV" at -481,-418.57 h60
  text "GND" at 401.53,-418.57 h60
  text "~" at 403,-516 h60
  text "GND" at -481,-518.5 h60
  text "D5" at 432.3,-518.5 h60
  text "SPI" at 376,-557.27 h60 r90
  text "CLK" at 389,-569 h60
  text "~" at 403,-616 h60
  text "3V3" at -481,-618.43 h60
  text "D6" at 432.06,-618.43 h60
  text "Q" at 387,-661 h60
  text "~" at 403,-716 h60
  text "GND" at -481,-718.36 h60
  text "D7" at 431.71,-718.36 h60
  text "D" at 387,-766 h60
  text "~" at 403,-816 h60
  text "3V3" at -481,-818.29 h60
  text "D8" at 431.42,-818.29 h60
  text "CS" at 387,-870 h60
  text "EN" at -481,-918.21 h60
  text "RX" at 430.31,-918.21 h60
  text "~D9" at 389.76,-968 h60
  text "NODEMCU" at -50,-990 h90
  text "RST" at -481,-1018.14 h60
  text "TX" at 427.97,-1018.14 h60
  text "DEVKIT V0.9" at -70,-1060 h65
  text "~D10" at 360.34,-1068 h60
  text "GND" at -481,-1118.07 h60
  text "GND" at 401.41,-1118.07 h60
  text "05/12/2014" at -65,-1120 h69
  text "5V" at -481,-1218 h60
  text "3V3" at 403.11,-1218 h60
  text "USER" at -229.88,-1230.59 h60 r270
  text "FLASH" at 229,-1339.75 h60 r90
Bottom Overlay:
  drawing of 5029 lines, arcs and shapes, not listed
  text "6buE6ZSQ" at 585,274 h30
  text "NODEMCU" at 434,149 h200 r90
  text "WWW.NODEMCU.COM" at 429,-571 h90 r90
  text "----------------" at -404,-575 h80 r90
  text "NODEMCU  VER0.9" at -343,-575 h70 r90
  text "ESP-12 CORE" at -266,-575 h70 r90
  text "WI-FI IOT PLATFORM" at -198,-575 h70 r90
  text "----------------" at -150,-575 h80 r90
  text "MCU IN THE CLOUDS" at -95,-575 h70 r90
  text "----------------" at 55,-575 h80 r90
  text "connect.theWorld()" at -12,-577 h70 r90
Top Paste:
  rectangle: -106,-1266 -81,-1237
  rectangle: 81,-1266 106,-1237
  rectangle: 81,-1313 106,-1284
  rectangle: -106,-1313 -81,-1284
  rectangle: -68.6,-1266 -43.6,-1237
  rectangle: -68.6,-1313 -43.6,-1284
  rectangle: -31.2,-1266 -6.2,-1237
  rectangle: -31.2,-1313 -6.2,-1284
  rectangle: 6.2,-1266 31.2,-1237
  rectangle: 6.2,-1313 31.2,-1284
  rectangle: 43.6,-1266 68.6,-1237
  rectangle: 43.6,-1313 68.6,-1284
  rectangle: 81,-1360 106,-1331
  rectangle: -106,-1360 -81,-1331
  rectangle: -68.6,-1360 -43.6,-1331
  rectangle: -31.2,-1360 -6.2,-1331
  rectangle: 6.2,-1360 31.2,-1331
  rectangle: 43.6,-1360 68.6,-1331
Top Solder:
  rectangle: -106,-1360 106,-1237
Mechanical 15:
  text "3.048x4.6793cm" at -601,-1516 h60
Drill Drawing:
  text ".Legend" at 777,-1574 h60

## Text inside footprints (layer, text, board x,y; h text height)
U1: Mechanical 13 "ANTENNA AREA" at -309.96,451.67 h10; Mechanical 13 "CUTOUT POLYGON" at -309.96,431.67 h10